# Altium PCB altium.pcbdoc
Units mil, origin at the board's own origin, x right, y up, seen from the top; angles counter-clockwise.
Board outline 2630.38 x 1916.8 mil, 2 copper layers (Top Layer, Bottom Layer); 10 components, 16 nets, 39 pads, 0 vias.
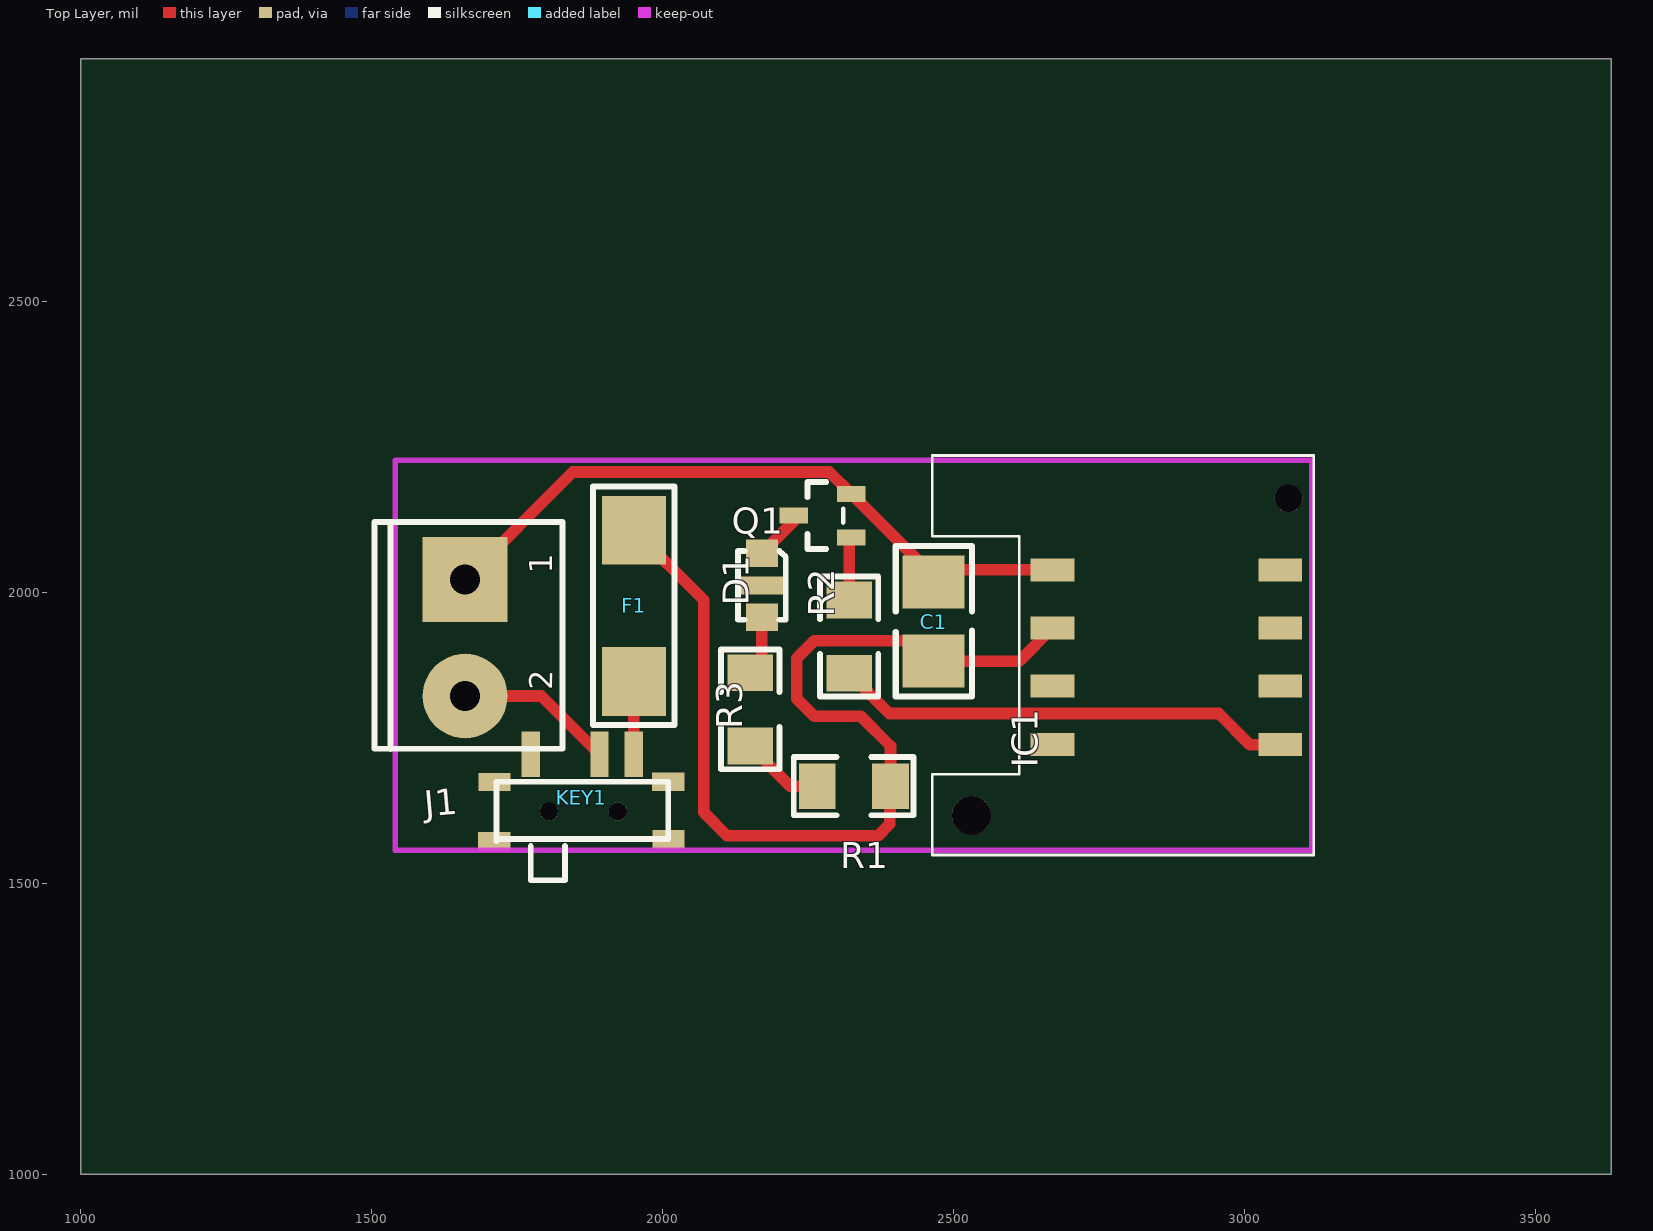
[diagram p0: Top Layer view]
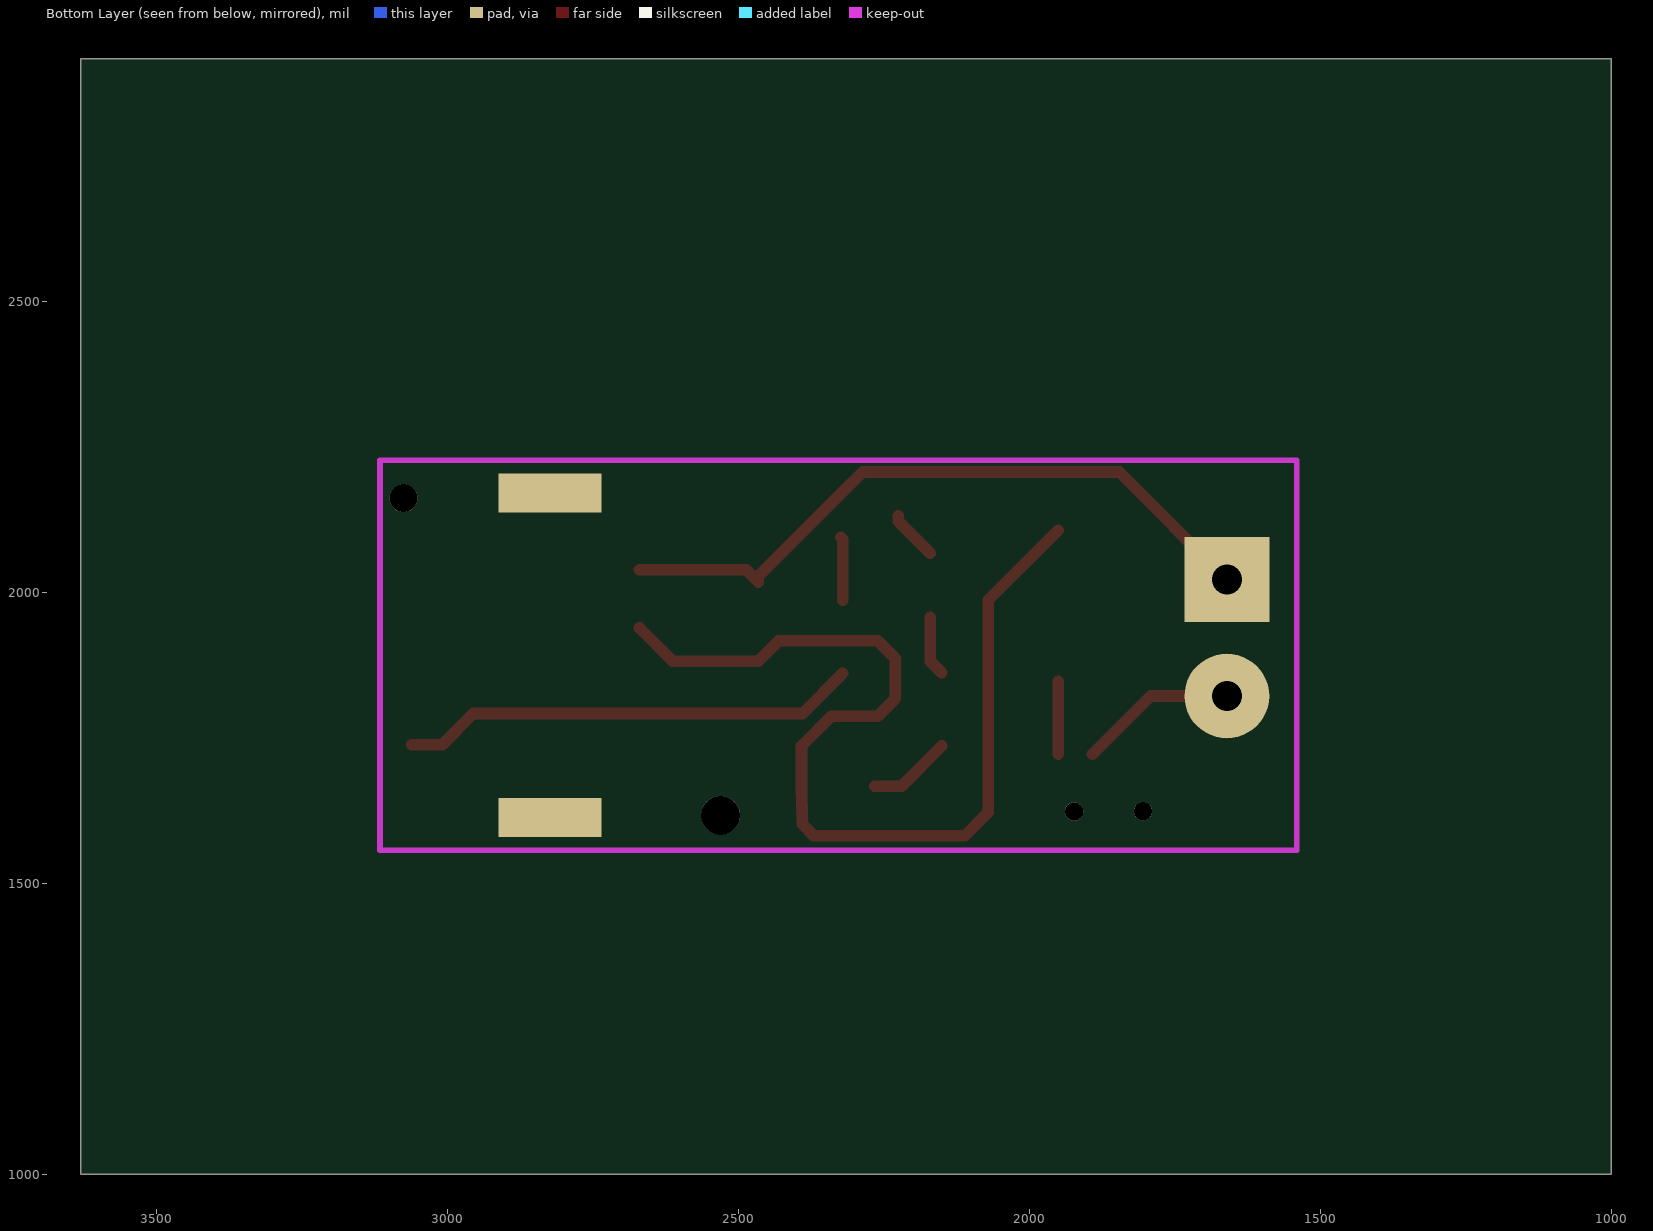
[diagram p1: Bottom Layer view, seen from below]

## Layer stack, top to bottom
Top Layer: signal copper (thickness not stored)
Dielectric: dielectric 12.6, FR-4, Dk 4.8
Bottom Layer: signal copper (thickness not stored)

## Board outline
3630.38,1000 1000,1000 1000,2916.8 3630.38,2916.8

## Components (designator, comment, footprint, x,y, rotation, side; value= is the part's Value field where it differs from the comment)
C1 "100nF" 1210 2465.67,1949.54 r270 top
D1 "WL-SWTP3022" WL-SWTP_3022 2270.67,2011.54 r270 top
F1 "_" OMF_125 1665.67,1606.54 r90 top
IC1 "TR-72D" IQRF_KON-SIM-01 2865.67,1891.54 r90 top
J1 "KF127_2P_5.08" KF127_2P_5.08 1650.67,1931.54 r0 top
KEY1 "MSK-11027 Toggle Switches" MSK-11027 1860.49,1646.81 r0 top
Q1 "BC847B" SOT-23(SOT-23-3) 2274.87,2131.54 r90 top
R1 "18" 1206 2328.66,1666.54 r180 top
R2 "820" 1206 2320.67,1923.55 r90 top
R3 "10" 1206 2150.67,1798.55 r90 top

## Footprints (in the part's own frame and the unit in brackets; to place one, negate y for a bottom-side part, rotate by r counter-clockwise, add the part's x,y. Pads: shape width x height; smd on the part's side, far side on the other; paste and mask are expansions set on the pad)
1206 [mil]
  rect 63x78.74 smd: 1(-62.99,0) 2(62.99,0)
  silkscreen extent -103,-50 103,50
1210 [mil]
  rect 90.55x106.3 smd: 1(-68,0) 2(68,0)
  silkscreen extent -130,-65 129,66
IQRF_KON-SIM-01 [mm]
  rect 1x1.9 smd: 1(-3.9,4.97) 2(-1.35,4.97) 3(1.19,4.97) 4(3.73,4.97) 5(-3.9,-4.969) 6(-1.35,-4.969) 7(1.19,-4.969) 8(3.73,-4.969)
  rect 1.7x4.5 smd far side: 9(-7.08,1.07) 9(7.079,1.07)
  silkscreen extent -8.72,-6.43 8.72,10.22
KF127_2P_5.08 [mil]
  rect 145.67x145.67 hole 51.18: 1(10,90)
  round 145.67 hole 51.18: 2(10,-110)
  silkscreen extent -146,-201 177,189
MSK-11027 [mm]
  rect 0.8x2 smd: 1(-2.209,1.898) 2(0.791,1.898) 3(2.291,1.898)
  rect 1.4x0.8 smd: 4(-3.793,0.688) 5(3.79,0.697) 6(3.802,-1.812) 7(-3.802,-1.898)
  round 0.8 hole 0.8 unplated: ""(-1.413,-0.597) ""(1.589,-0.599)
  silkscreen extent -3.71,-3.6 3.79,0.7
OMF_125 [mm]
  rect 3x2.8 smd: 1(6.096,-7.239) 2(12.7,-7.239)
  silkscreen extent 4.19,-9.02 14.6,-5.46
SOT-23(SOT-23-3) [mm]
  rect 0.7x1.25 smd: 1(-0.95,-1.25) 2(0.95,-1.25) 3(0,1.25)
  silkscreen extent -1.46,-0.9 1.46,0.65
WL-SWTP_3022 [mil]
  rect 47.2x55.1 smd: 1(-55,-100) 2(55,-100)
  rect 31.5x82.7 smd: 3(0,-100)
  silkscreen extent -59,-141 59,-59

## Free pads (board coordinates)
  round 67 hole 67 unplated: ""(2530.67,1616.54)
  round 48 hole 48 unplated: ""(3075.67,2161.54)

## Nets (pads, with @x,y where several pads share a name; then routed paths per layer and width w, separated by ;. In a path a pad name is that pad's centre, name@x,y a point inside that pad or via, vN(x,y) a via of type N, cw(c..) or ccw(c..) an arc to the next point about the centre after c; other vN are vias at no path point)
5V: C1.2 F1.2 IC1.3 R1.1 | length 1767.9
  Top Layer w20: F1.2 2070.67,1986.54 2070.67,1621.54 2110.67,1581.54 2370.67,1581.54 2390.67,1601.54 2391.67,1666.54 2391.67,1735.54 2340.67,1786.54 2260.67,1786.54 2230.67,1816.54 2230.67,1886.54 2260.67,1916.54 2430.67,1916.54 C1.2 2613.14,1881.54 IC1.3
+5V: J1.2 KEY1.2 | length 272.4
  Top Layer w20: J1.2 1791.62,1821.54 KEY1.2
D1_1: D1.1 Q1.3 | length 87.8
  Top Layer w20: D1.1 2225.67,2121.54 Q1.3
D1_2: D1.2 R3.2 | length 103.3
  Top Layer w20: R3.2 2170.67,1881.54 D1.2
GND: C1.1 IC1.4 J1.1 Q1.2 | length 1178.6
  Top Layer w20: J1.1 1845.67,2206.54 2286.47,2206.54 Q1.2 2465.67,2027.34 C1.1 2486.53,2038.4 IC1.4
IC1_1: IC1.1
IC1_2: IC1.2
IC1_6: IC1.6
IC1_7: IC1.7
IC1_8: IC1.8
KEY1_1: KEY1.1
KEY1_3: F1.1 KEY1.3 | length 125
  Top Layer w20: KEY1.3 F1.1
R1_2: R1.2 R3.1 | length 143.6
  Top Layer w20: R3.1 2219.69,1666.54 R1.2
R2_1: IC1.5 R2.1 | length 791.4
  Top Layer w20: R2.1 2389.69,1791.54 2955.67,1791.54 3009.17,1738.04 IC1.5
R2_2: Q1.1 R2.2 | length 109
  Top Layer w20: R2.2 2320.67,2090.74 Q1.1
S$22: 
pads on no net: D1.3 IC1.9 KEY1. KEY1.4 KEY1.5 KEY1.6 KEY1.7

## Text inside footprints (layer, text, board x,y; h text height)
J1: Top Overlay "1" at 1810.36,2031.54 h39.37 r90; Top Overlay "2" at 1810.35,1831.2 h39.37 r89